# Altium PCB 32pinFFC_Breakout_PCB.PcbDoc
Units mm, origin at the board's own origin, x right, y up, seen from the top; angles counter-clockwise.
Board outline 28.9 x 45.7 mm, 2 copper layers (L1, L2), stack 1.595 mm thick; 10 components, 32 nets, 76 pads, 54 vias.
Unrouted connection lines stored in the file: 30.
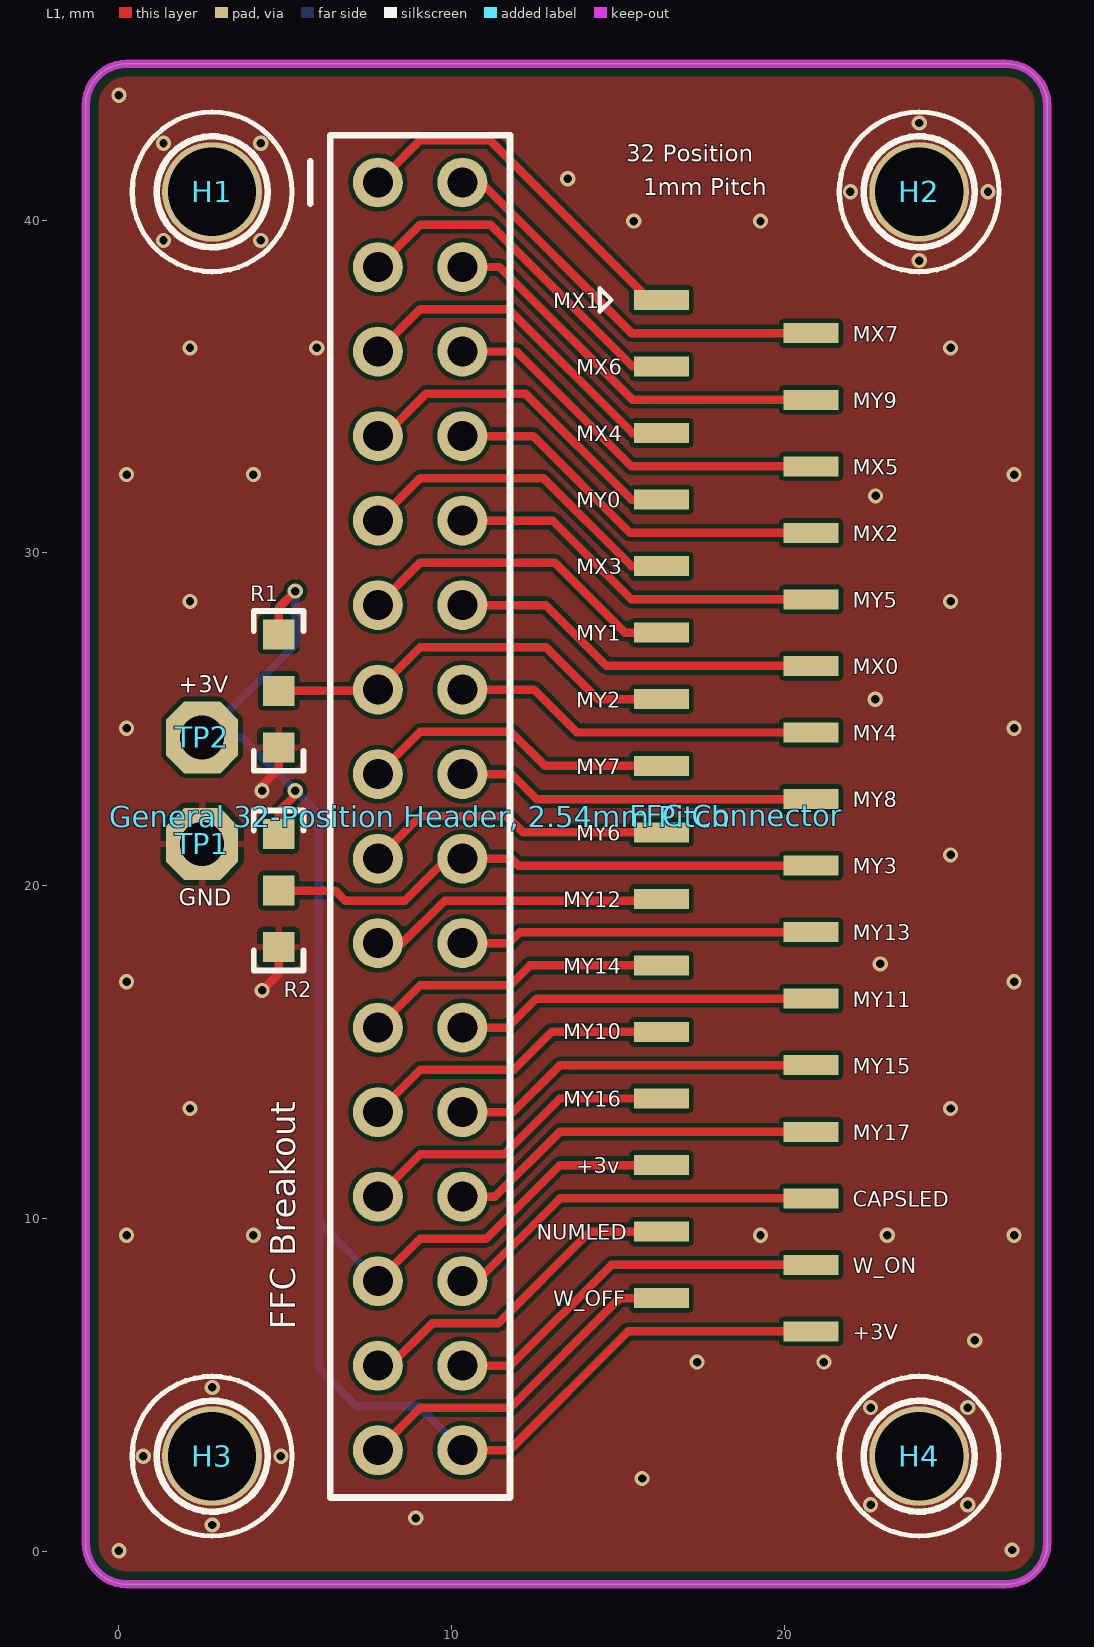
[diagram p0: L1 view]
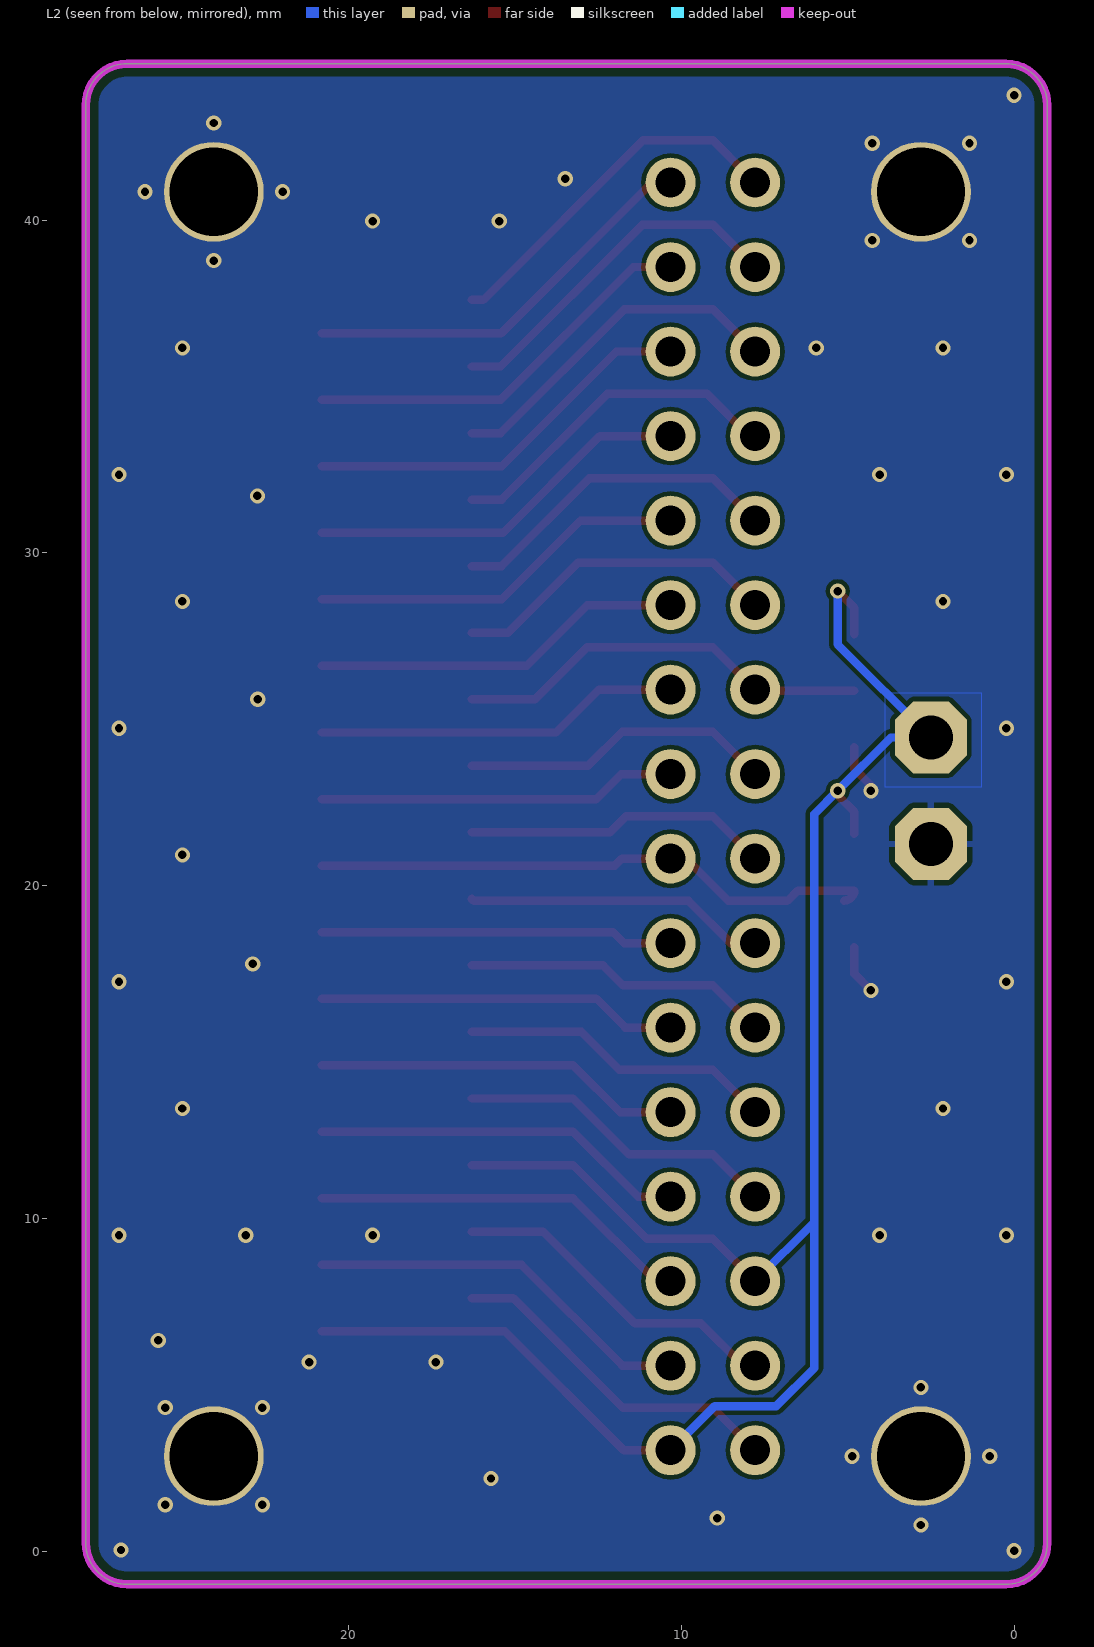
[diagram p1: L2 view, seen from below]

## Layer stack, top to bottom
Top Solder: solder mask 0.0025, Solder Resist, Dk 0
L1: signal copper 0.0356
Core: dielectric 1.524, FR-4, Dk 4.6
L2: signal copper 0.0356
Bottom Solder: solder mask 0.0025, Solder Resist, Dk 0

## Board outline
0.25,-1 cw(c0.25,0.25) -1,0.25 -1,43.45 cw(c0.25,43.45) 0.25,44.7 26.65,44.7 cw(c26.65,43.45) 27.9,43.45 27.9,0.25 cw(c26.65,0.25) 26.65,-1

## Design rules (kind name [scope] priority, off if disabled: settings)
AssemblyTestPointUsage [All] p1 off:
AssemblyTestpoint [(IsPad And (OnTopLayer Or OnBottomLayer)) Or (IsVia) Or (IsPad And OnMultiLayer)] p1 off: testpointundercomponent=FALSE minsize=0.457 maxsize=0.864 preferedsize=0.457 minholesize=0.254 maxholesize=0.66 preferedholesize=0.254 testpointgrid=0.025 usegrid=FALSE gridtolerance=0 allowsidetop=TRUE
BoardOutlineClearance BoardOutlineClearance_Overlays [(OnLayer('Top Overlay') OR OnLayer('Bottom Overlay'))] p1: gap=0.381 ignorepadtopadclearanceinfootprint=FALSE except(0: Arc-OutlineEdge Arc-CavityEdge Arc-CutoutEdge Arc-SplitBarrior Arc-SplitContinuation Track-OutlineEdge Track-CavityEdge Track-CutoutEdge Track-SplitBarrior Track-SplitContinuation Text-OutlineEdge Text-CavityEdge Text-CutoutEdge Text-SplitBarrior Text-SplitContinuation)
BoardOutlineClearance [All] p2: gap=0.381 ignorepadtopadclearanceinfootprint=FALSE
Clearance FiducialClearance [HasFootprint('FIDU_ROUND_20mil') OR HasFootprint('FIDU_ROUND_40mil') OR HasFootprint('FIDU_SQUARE_20mil') OR HasFootprint('FIDU_SQUARE_20mil')] p1: gap=0.66 ignorepadtopadclearanceinfootprint=FALSE
Clearance "TOP_GND Clearance" [InNamedPolygon('Tiva_TopGND')] p2: gap=0.127 ignorepadtopadclearanceinfootprint=FALSE except(0: Arc-Hole Track-Hole SMDPad-Hole THPad-Hole Via-Hole Fill-Hole Poly-Hole Region-Hole Text-Hole)
Clearance "TPS_TopGnd Clearance" [InNamedPolygon('TPS_BottomGnd')] p3: gap=0.127 ignorepadtopadclearanceinfootprint=FALSE except(0: Arc-Hole Track-Hole SMDPad-Hole THPad-Hole Via-Hole Fill-Hole Poly-Hole Region-Hole Text-Hole)
Clearance [All] p4: gap=0.127 ignorepadtopadclearanceinfootprint=FALSE except(0: Arc-Hole Track-Hole SMDPad-Hole THPad-Hole Via-Hole Fill-Hole Poly-Hole Region-Hole Text-Hole)
ComponentClearance [All] p1: gap=0 collisioncheckmode=3 verticalgap=0 showdistances=FALSE
DiffPairsRouting DiffPair_AIN_DIFF1DiffPairsRouting [InDifferentialPairClass('AIN_DIFF1')] p1: maxlimit=0.254 minlimit=0.152 mostfreqgap=0.178 toplayer_minwidth=0.203 toplayer_maxwidth=0.203 toplayer_prefwidth=0.203 bottomlayer_minwidth=0.203 bottomlayer_maxwidth=0.203 bottomlayer_prefwidth=0.203 maxuncoupledlength=2.54
DiffPairsRouting DiffPair_AIN_DIFF2DiffPairsRouting [InDifferentialPairClass('AIN_DIFF2')] p2: maxlimit=0.254 minlimit=0.152 mostfreqgap=0.178 toplayer_minwidth=0.203 toplayer_maxwidth=0.203 toplayer_prefwidth=0.203 bottomlayer_minwidth=0.203 bottomlayer_maxwidth=0.203 bottomlayer_prefwidth=0.203 maxuncoupledlength=2.54
DiffPairsRouting DiffPair_AIN_DIFF3DiffPairsRouting [InDifferentialPairClass('AIN_DIFF3')] p3: maxlimit=0.254 minlimit=0.152 mostfreqgap=0.178 toplayer_minwidth=0.203 toplayer_maxwidth=0.203 toplayer_prefwidth=0.203 bottomlayer_minwidth=0.203 bottomlayer_maxwidth=0.203 bottomlayer_prefwidth=0.203 maxuncoupledlength=2.54
DiffPairsRouting DiffPair_AIN_DIFF4DiffPairsRouting [InDifferentialPairClass('AIN_DIFF4')] p4: maxlimit=0.254 minlimit=0.152 mostfreqgap=0.178 toplayer_minwidth=0.203 toplayer_maxwidth=0.203 toplayer_prefwidth=0.203 bottomlayer_minwidth=0.203 bottomlayer_maxwidth=0.203 bottomlayer_prefwidth=0.203 maxuncoupledlength=2.54
DiffPairsRouting DiffPair_AIN_DIFF8DiffPairsRouting [InDifferentialPairClass('AIN_DIFF8')] p5: maxlimit=0.254 minlimit=0.152 mostfreqgap=0.178 toplayer_minwidth=0.203 toplayer_maxwidth=0.203 toplayer_prefwidth=0.203 bottomlayer_minwidth=0.203 bottomlayer_maxwidth=0.203 bottomlayer_prefwidth=0.203 maxuncoupledlength=2.54
DiffPairsRouting DiffPair_AIN_DIFF9DiffPairsRouting [InDifferentialPairClass('AIN_DIFF9')] p6: maxlimit=0.254 minlimit=0.152 mostfreqgap=0.178 toplayer_minwidth=0.203 toplayer_maxwidth=0.203 toplayer_prefwidth=0.203 bottomlayer_minwidth=0.203 bottomlayer_maxwidth=0.203 bottomlayer_prefwidth=0.203 maxuncoupledlength=2.54
DiffPairsRouting DiffPair_DIFF100DiffPairsRouting [InDifferentialPairClass('DIFF100')] p7: maxlimit=0.711 minlimit=0.178 mostfreqgap=0.254 toplayer_minwidth=0.254 toplayer_maxwidth=0.254 toplayer_prefwidth=0.254 bottomlayer_minwidth=0.254 bottomlayer_maxwidth=0.254 bottomlayer_prefwidth=0.254 maxuncoupledlength=7.163
DiffPairsRouting [All] p8: maxlimit=0.254 minlimit=0.254 mostfreqgap=0.254 toplayer_minwidth=0.381 toplayer_maxwidth=0.381 toplayer_prefwidth=0.381 bottomlayer_minwidth=0.381 bottomlayer_maxwidth=0.381 bottomlayer_prefwidth=0.381 maxuncoupledlength=12.7
FabricationTestPointUsage [All] p1 off: valid=0 allowmultiple=FALSE
FabricationTestpoint [(IsPad And (OnTopLayer Or OnBottomLayer)) Or (IsVia) Or (IsPad And OnMultiLayer)] p1 off: side=1 testpointundercomponent=FALSE minsize=0.457 maxsize=0.864 preferedsize=0.457 minholesize=0 maxholesize=0.66 preferedholesize=0.254 testpointgrid=0.025 allowsidetop=TRUE usegrid=FALSE gridtolerance=0
HoleSize [All] p1: absolutevalues=TRUE maxlimit=3.251 minlimit=0.254 maxpercent=80.000 minpercent=20.000
HoleToHoleClearance [All] p1: gap=0.127 allowstackedmicrovias=TRUE
MatchedLengths DiffPair_AIN_DIFF1MatchedLengths [InDifferentialPairClass('AIN_DIFF1')] p1: tolerance=4.3 checknetsindiffpair=TRUE checkdiffpairvsdiffpair=FALSE checkxsignals=FALSE checkothers=FALSE
MatchedLengths DiffPair_AIN_DIFF2MatchedLengths [InDifferentialPairClass('AIN_DIFF2')] p2: tolerance=4.3 checknetsindiffpair=TRUE checkdiffpairvsdiffpair=FALSE checkxsignals=FALSE checkothers=FALSE
MatchedLengths DiffPair_AIN_DIFF3MatchedLengths [InDifferentialPairClass('AIN_DIFF3')] p3: tolerance=4.3 checknetsindiffpair=TRUE checkdiffpairvsdiffpair=FALSE checkxsignals=FALSE checkothers=FALSE
MatchedLengths DiffPair_AIN_DIFF4MatchedLengths [InDifferentialPairClass('AIN_DIFF4')] p4: tolerance=4.3 checknetsindiffpair=TRUE checkdiffpairvsdiffpair=FALSE checkxsignals=FALSE checkothers=FALSE
MatchedLengths DiffPair_AIN_DIFF8MatchedLengths [InDifferentialPairClass('AIN_DIFF8')] p5: tolerance=4.3 checknetsindiffpair=TRUE checkdiffpairvsdiffpair=FALSE checkxsignals=FALSE checkothers=FALSE
MatchedLengths DiffPair_AIN_DIFF9MatchedLengths [InDifferentialPairClass('AIN_DIFF9')] p6: tolerance=4.3 checknetsindiffpair=TRUE checkdiffpairvsdiffpair=FALSE checkxsignals=FALSE checkothers=FALSE
MatchedLengths DiffPair_DIFF100MatchedLengths [InDifferentialPairClass('DIFF100')] p7: tolerance=1.27 checknetsindiffpair=TRUE checkdiffpairvsdiffpair=FALSE checkxsignals=FALSE checkothers=FALSE
MinimumAnnularRing [All] p1: minimumring=0.102
MinimumSolderMaskSliver MinimumSolderMaskSliverBotSolder [OnLayer('Bottom Solder') vs OnLayer('Bottom Solder')] p1: minsoldermaskwidth=0.01
MinimumSolderMaskSliver [All] p2: minsoldermaskwidth=0.076
NetAntennae [All] p1 off: netantennaetolerance=0
PlaneConnect [All] p1: planeconnectstyle=Relief reliefexpansion=0.508 reliefentries=4 reliefconductorwidth=0.254 reliefairgap=0.203
PolygonConnect ThermalVias [(OnLayer('Ground Plane') OR OnLayer('Power Plane')) vs (IsVia) OR (PadViaLibraryTemplate = 'c150h90')] p1: connectstyle=Direct reliefconductorwidth=0.254 reliefentries=4 polygonreliefangle="90 Angle" airgapwidth=0.254
PolygonConnect DirectVias [IsNamedPolygon('TPS_GND') OR IsNamedPolygon('TPS_JUMP_+3V3') OR IsNamedPolygon('TPS_VSYS') OR IsNamedPolygon('TPS_L1') OR IsNamedPolygon('TPS_L2') OR IsNamedPolygon('TPS_SS') OR IsNamedPolygon('TPS_PG') OR IsNamedPolygon('BQ_VSYS') OR IsNamedPolygon('BQ_PACK+') OR IsNamedPolygon('BQ_USBVBUS') OR IsNamedPolygon('GNDA') OR IsNamedPolygon('Tiva_BottomGND') OR IsNamedPolygon('Tiva_TopGND') OR IsNamedPolygon('FUEL-PGND') vs IsVia] p2: connectstyle=Direct reliefconductorwidth=0.254 reliefentries=4 polygonreliefangle="90 Angle" airgapwidth=0.254
PolygonConnect "Cap Res Relief" [All vs (HasFootprint('C0402_1005') OR HasFootprint('C0603_1608') OR HasFootprint('C1206_3216') OR HasFootprint('C1812_4532') OR HasFootprint('R0402_1005') OR HasFootprint('R0603_1608') OR HasFootprint('R2512_6332') OR HasFootprint('L0402_1005') OR HasFootprint('L0805_2012') OR HasFootprint('L1008_2520') OR HasFootprint('LED0603_Flat') OR HasFootprint('LED0603_Molded'))] p3: connectstyle=Relief reliefconductorwidth=0.203 reliefentries=4 polygonreliefangle="90 Angle" airgapwidth=0.152
PolygonConnect "Pad Template Relief" [All vs (PadViaLibraryTemplate = 'c150h90') OR (PadViaLibraryTemplate = 'c70h30m75')  OR (PadViaLibraryTemplate = 'r102_71') OR (PadViaLibraryTemplate = 'r80_150') OR (PadViaLibraryTemplate = 'r145_200') OR (PadViaLibraryTemplate = 'r145_90') OR (PadViaLibraryTemplate = 'r140_120') OR (PadViaLibraryTemplate = 'r95_90') OR (PadViaLibraryTemplate = 's216h132c50')  OR (PadViaLibraryTemplate = 'c216h132')] p4: connectstyle=Relief reliefconductorwidth=0.203 reliefentries=4 polygonreliefangle="90 Angle" airgapwidth=0.152
PolygonConnect "General Direct Connect" [IsNamedPolygon('TPS_L1') OR IsNamedPolygon('TPS_L2') OR IsNamedPolygon('TPS_SS') OR IsNamedPolygon('TPS_PG') OR IsNamedPolygon('BQ_VSYS') OR IsNamedPolygon('BQ_PACK+') OR IsNamedPolygon('BQ_USBVBUS') OR IsNamedPolygon('FUEL-Bat') OR IsNamedPolygon('Pack+') OR IsNamedPolygon('GNDA')] p5 off: connectstyle=Direct reliefconductorwidth=0.254 reliefentries=4 polygonreliefangle="90 Angle" airgapwidth=0.254
PolygonConnect "General Direct Connect ALL" [All] p6: connectstyle=Direct reliefconductorwidth=0.254 reliefentries=4 polygonreliefangle="90 Angle" airgapwidth=0.254
PolygonConnect [All] p7: connectstyle=Relief reliefconductorwidth=0.203 reliefentries=4 polygonreliefangle="90 Angle" airgapwidth=0.152
RoutingCorners [All] p1: cornerstyle=45-Degree minsetback=0.127 maxsetback=2.54
RoutingVias [All] p1: holewidth=0.254 width=0.457 viastyle="Through Hole" minholewidth=0.254 minwidth=0.457 maxholewidth=1.067 maxwidth=1.27
ShortCircuit ThermalViasShrtCkt [IsVia] p1: allowed=TRUE
ShortCircuit [All] p2: allowed=FALSE
SilkToSilkClearance [All] p1 off: silktosilkclearance=0.025
SilkToSolderMaskClearance [IsPad] p1: minsilkscreentomaskgap=0.025 clearancetoexposedcopper=TRUE
SolderMaskExpansion [All] p1: expansion=0.05
Width "50 Ohm" [InNetClass('50 OHM')] p1: maxlimit=0.508 minlimit=0.203 preferedwidth=0.254 impedancedriven=TRUE minimp=49.000000 maximp=51.000000 favimp=50.000000
Width [All] p2: maxlimit=2.508 minlimit=0.102 preferedwidth=0.203 minimp=50.000000 maximp=50.000000 favimp=50.000000
15 further rules are at their usual default settings.

## Components (designator, comment, footprint, x,y, rotation, side; value= is the part's Value field where it differs from the comment)
"FFC Connector" "hanetzer FFC Connector" "Hanetzer 32Pin FCC Connector" 18.55,22.1 r270 top
"General 32-Position Header, 2.54mm Pitch" "hanetzer header" "hanetzer header" 9.05,23.35 r0 top
H1 "Mounting Hole" MntHole-M2.5x4mm 2.8,40.85 r0 top
H2 "Mounting Hole" MntHole-M2.5x4mm 24.05,40.85 r0 top
H3 "Mounting Hole" MntHole-M2.5x4mm 2.8,2.85 r0 top
H4 "Mounting Hole" MntHole-M2.5x4mm 24.05,2.85 r0 top
R1 "0" R0603_1608_Three_Pad 4.8,27.55 r270 top
R2 "0" R0603_1608_Three_Pad 4.8,21.55 r270 top
TP1 "TestPt" TP1 2.5,21.25 r0 top
TP2 "TestPt" TP1_ROUND 2.5,24.45 r0 top

## Footprints (in the part's own frame and the unit in brackets; to place one, negate y for a bottom-side part, rotate by r counter-clockwise, add the part's x,y. Pads: shape width x height; smd on the part's side, far side on the other; paste and mask are expansions set on the pad)
"Hanetzer 32Pin FCC Connector" [mm]
  rect 0.6x1.65 smd: 1(-15.5,-2.25) 2(-14.5,2.25) 3(-13.5,-2.25) 4(-12.5,2.25) 5(-11.5,-2.25) 6(-10.5,2.25) 7(-9.5,-2.25) 8(-8.5,2.25) 9(-7.5,-2.25) 10(-6.5,2.25) 11(-5.5,-2.25) 12(-4.5,2.25) 13(-3.5,-2.25) 14(-2.5,2.25) 15(-1.5,-2.25) 16(-0.5,2.25) 17(0.5,-2.25) 18(1.5,2.25) 19(2.5,-2.25) 20(3.5,2.25) 21(4.5,-2.25) 22(5.5,2.25) 23(6.5,-2.25) 24(7.5,2.25) 25(8.5,-2.25) 26(9.5,2.25) 27(10.5,-2.25) 28(11.5,2.25) 29(12.5,-2.25) 30(13.5,2.25) 31(14.5,-2.25) 32(15.5,2.25)
  silkscreen extent -15.85,-4.1 -15.15,-3.75, body extent -17.5,-2.25 17.5,2.25, height 5.25
"hanetzer header" [mm]
  round 1.5 hole 0.9: 1(-1.27,17.78) 2(1.27,17.78) 3(-1.27,15.24) 4(1.27,15.24) 5(-1.27,12.7) 6(1.27,12.7) 7(-1.27,10.16) 8(1.27,10.16) 9(-1.27,7.62) 10(1.27,7.62) 11(-1.27,5.08) 12(1.27,5.08) 13(-1.27,2.54) 14(1.27,2.54) 15(-1.27,0) 16(1.27,0) 17(-1.27,-2.54) 18(1.27,-2.54) 19(-1.27,-5.08) 20(1.27,-5.08) 21(-1.27,-7.62) 22(1.27,-7.62) 23(-1.27,-10.16) 24(1.27,-10.16) 25(-1.27,-12.7) 26(1.27,-12.7) 27(-1.27,-15.24) 28(1.27,-15.24) 29(-1.27,-17.78) 30(1.27,-17.78) 31(-1.27,-20.32) 32(1.27,-20.32)
  silkscreen extent -3.3,-21.74 2.7,19.2
MntHole-M2.5x4mm [mm] "Mounting Hole, 2.5X4mm Machine Screws"
  round 3 hole 2.65 paste+0 mask+0.1: 1(0,0)
  silkscreen extent -2.4,-2.4 2.4,2.4, body extent -2.25,-2.25 2.25,2.25, height 2.24
R0603_1608_Three_Pad [mm] "Chip Resistor, 2-Leads, Body 1.60x0.80mm, IPC Medium Density"
  rect 0.9x0.95 smd: 1(0,0) 2(1.7,0) 3(3.4,0)
  silkscreen extent -0.7,-0.75 4.1,0.75, body extent 0,-0.45 1.7,0.45, height 0.55
TP1 [mil]
  oct 85x85 hole 52: TP(0,0)
TP1_ROUND [mil]
  oct 85x85 hole 52: TP(0,0)

## Part data
"FFC Connector": Current Rating="1 A", Insulation Resistance="500 MOhms", Manufacturer="Amphenol FCI", Manufacturer Part Number=HFW32S-2STE1LF, Maximum Operating Temperature="+ 85 C", Minimum Operating Temperature="- 55 C", Supplier Part Number 1=649-HFW32S-2STE1LF, Voltage Rating="100 VAC/DC", Actuation Type="Non ZIF", Brand="Amphenol FCI", Category="FFC & FPC Connectors", ComponentLink1Description=https://www.mouser.com/ds/2/18/sc-hfws06-943200.pdf, ComponentLink1URL=https://www.mouser.com/ds/2/18/sc-hfws06-943200.pdf, Contact Location="Bottom Contact", Contact Material="Phosphor Bronze", Contact Plating=Tin, Housing Material="Polyamide (PA)", Minimum Order Quantity=1, Mounting Angle=Straight, Number of Positions="32 Position", Packaging="Cut Tape", Pitch="1 mm", Pricing 1="1=0.530, 10=0.393, 100=0.377, 500=0.327, 1000=0.270, 2000=0.246, 5000=0.238, 10000=0.221, 25000=0.218 (USD)", Product="Board Mount", Reeling=True, RoHS="RoHS Compliant", RoHS - Mouser=Y, Series=HFW-S, Standard Pack Qty=1000, Stock 1=1236, Supplier 1=Mouser, Termination Style=SMD
H1 H2 H3 H4: library part MntHole_M2.5x4mm, "Mount Hole for M2.5x4mm Machine Screws"
R1 R2: library part R0THREEPAD(0603/1608)_1, "0 Resistor", Case Code - in=0603, Case Code - mm=1608, Manufacturer=Yageo, Manufacturer Part Number=RC0603FR-070RL, Operating Temperature Range="- 55 C to + 155 C", Package / Case="0603 (1608 metric)", Power Rating=-, Resistance="0 Ohms", Supplier Part Number 1=603-RC0603FR-070RL, Brand=Yageo, Category="Thick Film Resistors - SMD", ComponentLink1Description=http://www.mouser.com/ds/2/447/RC0603-272842.pdf, ComponentLink1URL=http://www.mouser.com/ds/2/447/RC0603-272842.pdf, Height="0.45 mm", Length="1.6 mm", Minimum Order Quantity=1, Packaging=Reel, Pricing 1="1=0.100, 10=0.010, 100=0.003, 1000=0.002, 5000=0.002, 10000=0.001 (USD)", Product="Thick Film Resistors Zero-Ohm", Reeling=True, RoHS="RoHS Compliant By Exemption", RoHS - Mouser=E, Series=RC, Standard Pack Qty=5000, Stock 1=686909, Supplier 1=Mouser, Temperature Coefficient=-, Termination Style=SMD/SMT, Tolerance=-, Type="General Purpose Chip Resistor Surface Mount", Voltage Rating=-, Width="0.8 mm"
TP1: library part TPPAD, "Test Point"
TP2: library part TPPAD_ROUND, "Test Point"

## Via types
v1: diameter 0.457, hole 0.254, L1 to L2, tented both sides, 50 vias
v2: diameter 0.457, hole 0.254, L1 to L2, 4 vias

## Nets (pads, with @x,y where several pads share a name; then routed paths per layer and width w, separated by ;. In a path a pad name is that pad's centre, name@x,y a point inside that pad or via, vN(x,y) a via of type N, cw(c..) or ccw(c..) an arc to the next point about the centre after c; other vN are vias at no path point)
3V: "FFC Connector.27" "FFC Connector.32" "General 32-Position Header, 2.54mm Pitch.27" "General 32-Position Header, 2.54mm Pitch.32" R1.1 R2.1 TP2.TP | length 59.5
  L1 w0.254: R2.1 4.8,22.218 5.3,22.718 v2(5.3,22.85) ; R1.1 4.8,28.35 v2(5.3,28.85) ; 7.78,8.11 9.05,9.38 11.03,9.38 13.25,11.6 16.3,11.6 ; 10.32,3.03 11.73,3.03 15.3,6.6 20.8,6.6
  L2 w0.254: v2(5.3,28.85) 5.3,27.25 TP2.TP 3.7,24.45 v2(5.3,22.85) 6,22.15 6,9.89 ; 7.78,8.11 6,9.89 ; 10.32,3.03 9,4.35 7.15,4.35 6,5.5 6,9.89
CAPSLED: "FFC Connector.28" "General 32-Position Header, 2.54mm Pitch.28" | length 11.5
  L1 w0.254: 10.32,8.11 10.76,8.11 13.25,10.6 20.8,10.6
GND: H1.1 H2.1 H3.1 H4.1 R1.3 R2.3 TP1.TP | length 3
  L1 w0.254: v2(4.3,16.85) 4.8,17.35 R2.3 ; v2(4.3,22.85) 4.3,23.01 4.8,23.51 R1.3
  other v1: -0.001,0.01 26.84,0.03 2.8,0.782 8.92,0.99 22.588,1.388 25.512,1.388 15.72,2.18 0.732,2.85 4.868,2.85 22.588,4.312 25.512,4.312 2.8,4.918 17.375,5.68 21.185,5.68 25.72,6.33 0.23,9.49 4.04,9.49 19.28,9.49 23.09,9.49 26.9,9.49 2.135,13.3 24.995,13.3 0.23,17.11 26.9,17.11 22.88,17.645 24.995,20.92 0.23,24.73 26.9,24.73 22.73,25.6 2.135,28.54 24.995,28.54 22.74,31.71 0.23,32.35 4.04,32.35 26.9,32.35 2.135,36.16 5.945,36.16 24.995,36.16 24.05,38.782 1.338,39.388 4.262,39.388 15.47,39.97 19.28,39.97 21.982,40.85 26.118,40.85 13.49,41.24 1.338,42.312 4.262,42.312 24.05,42.918 -0.001,43.75
MX0: "FFC Connector.12" "General 32-Position Header, 2.54mm Pitch.12" | length 11.2
  L1 w0.254: 10.32,28.43 12.82,28.43 14.65,26.6 20.8,26.6
MX1: "FFC Connector.1" "General 32-Position Header, 2.54mm Pitch.1" | length 11.2
  L1 w0.254: 7.78,41.13 8.08,41.13 8.08,41.43 9.05,42.4 11.15,42.4 15.95,37.6 16.3,37.6
MX2: "FFC Connector.8" "General 32-Position Header, 2.54mm Pitch.8" | length 11.7
  L1 w0.254: 10.32,33.51 12.45,33.51 15.36,30.6 20.8,30.6
MX3: "FFC Connector.9" "General 32-Position Header, 2.54mm Pitch.9" | length 10.1
  L1 w0.254: 7.78,30.97 9.05,32.24 12.76,32.24 15.4,29.6 16.3,29.6
MX4: "FFC Connector.5" "General 32-Position Header, 2.54mm Pitch.5" | length 10.6
  L1 w0.254: 7.78,36.05 9.05,37.32 11.71,37.32 15.43,33.6 16.3,33.6
MX5: "FFC Connector.6" "General 32-Position Header, 2.54mm Pitch.6" | length 11.9
  L1 w0.254: 10.32,36.05 11.95,36.05 15.4,32.6 20.8,32.6
MX6: "FFC Connector.3" "General 32-Position Header, 2.54mm Pitch.3" | length 10.8
  L1 w0.254: 7.78,38.59 9.05,39.86 11.17,39.86 15.43,35.6 16.3,35.6
MX7: "FFC Connector.2" "General 32-Position Header, 2.54mm Pitch.2" | length 11.8
  L1 w0.254: 10.83,41.13 10.88,41.13 15.41,36.6 20.8,36.6
MY0: "FFC Connector.7" "General 32-Position Header, 2.54mm Pitch.7" | length 10.4
  L1 w0.254: 7.78,33.51 7.96,33.51 9.23,34.78 12.22,34.78 15.4,31.6 16.3,31.6
MY1: "FFC Connector.11" "General 32-Position Header, 2.54mm Pitch.11" | length 9.9
  L1 w0.254: 7.78,28.43 9.05,29.7 13.1,29.7 15.2,27.6 16.3,27.6
MY2: "FFC Connector.13" "General 32-Position Header, 2.54mm Pitch.13" R1.2 | length 12.7
  L1 w0.254: R1.2 7.74,25.85 7.78,25.89 9.05,27.16 12.84,27.16 14.4,25.6 16.3,25.6
MY3: "FFC Connector.18" "General 32-Position Header, 2.54mm Pitch.18" R2.2 | length 17.2
  L1 w0.254: R2.2@5.1,19.55 cw(c5.1,19.85) R2.2 6.5,19.85 6.81,19.54 8.584,19.54 9.854,20.81 10.32,20.81 11.79,20.81 12,20.6 20.8,20.6
MY4: "FFC Connector.14" "General 32-Position Header, 2.54mm Pitch.14" | length 11
  L1 w0.254: 10.32,25.89 12.471,25.89 13.761,24.6 20.8,24.6
MY5: "FFC Connector.10" "General 32-Position Header, 2.54mm Pitch.10" | length 11.5
  L1 w0.254: 10.32,30.97 13.03,30.97 15.4,28.6 20.8,28.6
MY6: "FFC Connector.17" "General 32-Position Header, 2.54mm Pitch.17" | length 9.2
  L1 w0.254: 7.78,20.81 9.05,22.08 11.67,22.08 12.15,21.6 16.3,21.6
MY7: "FFC Connector.15" "General 32-Position Header, 2.54mm Pitch.15" | length 9.5
  L1 w0.254: 7.78,23.35 9.05,24.62 11.78,24.62 12.8,23.6 16.3,23.6
MY8: "FFC Connector.16" "General 32-Position Header, 2.54mm Pitch.16" | length 10.8
  L1 w0.254: 10.32,23.35 11.8,23.35 12.55,22.6 20.8,22.6
MY9: "FFC Connector.4" "General 32-Position Header, 2.54mm Pitch.4" | length 12.1
  L1 w0.254: 10.32,38.59 11.44,38.59 15.43,34.6 20.8,34.6
MY10: "FFC Connector.23" "General 32-Position Header, 2.54mm Pitch.23" | length 9.5
  L1 w0.254: 7.78,13.19 9.05,14.46 11.86,14.46 13,15.6 16.3,15.6
MY11: "FFC Connector.22" "General 32-Position Header, 2.54mm Pitch.22" | length 10.8
  L1 w0.254: 10.32,15.73 11.68,15.73 12.55,16.6 20.8,16.6
MY12: "FFC Connector.19" "General 32-Position Header, 2.54mm Pitch.19" | length 9.1
  L1 w0.254: 7.78,18.27 8.512,18.27 9.782,19.54 16.24,19.54 16.3,19.6
MY13: "FFC Connector.20" "General 32-Position Header, 2.54mm Pitch.20" | length 10.6
  L1 w0.254: 10.32,18.27 11.72,18.27 12.05,18.6 20.8,18.6
MY14: "FFC Connector.21" "General 32-Position Header, 2.54mm Pitch.21" | length 9.3
  L1 w0.254: 7.78,15.73 9.05,17 11.75,17 12.35,17.6 16.3,17.6
MY15: "FFC Connector.24" "General 32-Position Header, 2.54mm Pitch.24" | length 11.1
  L1 w0.254: 10.32,13.19 11.84,13.19 13.25,14.6 20.8,14.6
MY16: "FFC Connector.25" "General 32-Position Header, 2.54mm Pitch.25" | length 9.7
  L1 w0.254: 7.78,10.65 9.05,11.92 11.57,11.92 13.25,13.6 16.3,13.6
MY17: "FFC Connector.26" "General 32-Position Header, 2.54mm Pitch.26" | length 11.3
  L1 w0.254: 10.32,10.65 11.3,10.65 13.25,12.6 20.8,12.6
NUMLED: "FFC Connector.29" "General 32-Position Header, 2.54mm Pitch.29" | length 10.2
  L1 w0.254: 7.78,5.57 8.146,5.57 9.416,6.84 11.398,6.84 14.158,9.6 16.3,9.6
WIRELESS_OFF: "FFC Connector.31" "General 32-Position Header, 2.54mm Pitch.31" | length 10.4
  L1 w0.254: 7.78,3.03 9.05,4.3 11.75,4.3 15.05,7.6 16.3,7.6
WIRELESS_ON: "FFC Connector.30" "General 32-Position Header, 2.54mm Pitch.30" | length 11.7
  L1 w0.254: 10.32,5.57 11.77,5.57 14.8,8.6 20.8,8.6

## Polygon pours and split planes (outlines as drawn)
3V on L2 "Bottom +3V" (solid, remove dead copper, pour order 4): 3.864,25.8 0.99,25.8 0.99,22.95 3.864,22.95
GND on L2 "Bottom GND" (solid, remove dead copper, pour order 0): -1.25,44.95 28.15,44.95 28.15,-1.25 -1.25,-1.25
GND on L1 "Top GND" (solid, remove dead copper, pour order 2): -1.25,-1.25 -1.25,44.95 28.15,44.95 28.15,-1.25

## Keep-outs
Keep-Out Layer:
  the board outline again, w0.254

## Silkscreen, mask and mechanical layers (free items; w line width, h text height)
Top Overlay:
  text "32 Position" at 15.25,41.75 h0.5
  text "1mm Pitch" at 15.75,40.75 h0.5
  text "MX1" at 13.05,37.35 h0.46
  text "MX7" at 22.05,36.35 h0.46
  text "MX6" at 13.75,35.35 h0.46
  text "MY9" at 22.05,34.35 h0.46
  text "MX4" at 13.75,33.35 h0.46
  text "MX5" at 22.05,32.35 h0.46
  text "MY0" at 13.75,31.35 h0.46
  text "MX2" at 22.05,30.35 h0.46
  text "MX3" at 13.75,29.35 h0.46
  text "MY5" at 22.05,28.35 h0.46
  text "MY1" at 13.75,27.35 h0.46
  text "MX0" at 22.05,26.35 h0.46
  text "+3V" at 1.8,25.8 h0.5
  text "MY2" at 13.75,25.35 h0.46
  text "MY4" at 22.05,24.35 h0.46
  text "MY7" at 13.75,23.35 h0.46
  text "MY8" at 22.05,22.35 h0.46
  text "MY6" at 13.75,21.35 h0.46
  text "MY3" at 22.05,20.35 h0.46
  text "GND" at 1.8,19.4 h0.5
  text "MY12" at 13.35,19.35 h0.46
  text "MY13" at 22.05,18.35 h0.46
  text "MY14" at 13.35,17.35 h0.46
  text "MY11" at 22.05,16.35 h0.46
  text "MY10" at 13.35,15.375 h0.46
  text "MY15" at 22.05,14.35 h0.46
  text "MY16" at 13.35,13.35 h0.46
  text "MY17" at 22.05,12.35 h0.46
  text "+3v" at 13.75,11.35 h0.46
  text "CAPSLED" at 22.05,10.35 h0.46
  text "NUMLED" at 12.55,9.35 h0.46
  text "W_ON" at 22.05,8.35 h0.46
  text "W_OFF" at 13.05,7.35 h0.46
  text "FFC Breakout" at 5.3,6.65 h0.75 r90
  text "+3V" at 22.05,6.35 h0.46
Top Solder:
  lines w1.946: -0.75,0 -0.75,43.7 ; -0.75,0.5 ccw(c0.5,0.5) 0.5,-0.75 ; -0.75,43.2 cw(c0.5,43.2) 0.5,44.45 ; 0,-0.75 26.9,-0.75 ; 0,44.45 26.9,44.45 ; 26.4,-0.75 ccw(c26.4,0.5) 27.65,0.5 ; 26.4,44.45 cw(c26.4,43.2) 27.65,43.2 ; 27.65,0 27.65,43.7
  text "FOSS" at 12.75,1.05 h2.22
Bottom Solder:
  lines w0.254: 4.3,16.85 4.8,17.35 4.8,18.15 ; 4.3,22.85 4.3,23.01 4.8,23.51 4.8,24.15 ; 4.8,19.85 6.5,19.85 6.81,19.54 8.584,19.54 9.854,20.81 10.32,20.81 11.79,20.81 12,20.6 20.8,20.6 ; 4.8,21.55 4.8,22.218 5.3,22.718 5.3,22.85 ; 4.8,25.85 7.74,25.85 7.78,25.89 9.05,27.16 12.84,27.16 14.4,25.6 16.3,25.6 ; 4.8,27.55 4.8,28.35 5.3,28.85 ; 7.78,3.03 9.05,4.3 11.75,4.3 15.05,7.6 16.3,7.6 ; 7.78,5.57 8.146,5.57 9.416,6.84 11.398,6.84 14.158,9.6 16.3,9.6 ; 7.78,8.11 9.05,9.38 11.03,9.38 13.25,11.6 16.3,11.6 ; 7.78,10.65 9.05,11.92 11.57,11.92 13.25,13.6 16.3,13.6 ; 7.78,13.19 9.05,14.46 11.86,14.46 13,15.6 16.3,15.6 ; 7.78,15.73 9.05,17 11.75,17 12.35,17.6 16.3,17.6 ; 7.78,18.27 8.512,18.27 9.782,19.54 16.24,19.54 16.3,19.6 ; 7.78,20.81 9.05,22.08 11.67,22.08 12.15,21.6 16.3,21.6 ; 7.78,23.35 9.05,24.62 11.78,24.62 12.8,23.6 16.3,23.6 ; 7.78,28.43 9.05,29.7 13.1,29.7 15.2,27.6 16.3,27.6 ; 7.78,30.97 9.05,32.24 12.76,32.24 15.4,29.6 16.3,29.6 ; 7.78,33.51 7.96,33.51 9.23,34.78 12.22,34.78 15.4,31.6 16.3,31.6 ; 7.78,36.05 9.05,37.32 11.71,37.32 15.43,33.6 16.3,33.6 ; 7.78,38.59 9.05,39.86 11.17,39.86 15.43,35.6 16.3,35.6 ; 8.08,41.13 8.08,41.43 9.05,42.4 11.15,42.4 15.95,37.6 16.3,37.6 ; 10.32,3.03 11.73,3.03 15.3,6.6 20.8,6.6 ; 10.32,5.57 11.77,5.57 14.8,8.6 20.8,8.6 ; 10.32,8.11 10.76,8.11 13.25,10.6 20.8,10.6 ; 10.32,10.65 11.3,10.65 13.25,12.6 20.8,12.6 ; 10.32,13.19 11.84,13.19 13.25,14.6 20.8,14.6 ; 10.32,15.73 11.68,15.73 12.55,16.6 20.8,16.6 ; 10.32,18.27 11.72,18.27 12.05,18.6 20.8,18.6 ; 10.32,23.35 11.8,23.35 12.55,22.6 20.8,22.6 ; 10.32,25.89 12.471,25.89 13.761,24.6 20.8,24.6 ; 10.32,28.43 12.82,28.43 14.65,26.6 20.8,26.6 ; 10.32,30.97 13.03,30.97 15.4,28.6 20.8,28.6 ; 10.32,33.51 12.45,33.51 15.36,30.6 20.8,30.6 ; 10.32,36.05 11.95,36.05 15.4,32.6 20.8,32.6 ; 10.32,38.59 11.44,38.59 15.43,34.6 20.8,34.6 ; 10.83,41.13 10.88,41.13 15.41,36.6 20.8,36.6
  lines w1.946: -0.75,0 -0.75,43.7 ; -0.75,0.5 ccw(c0.5,0.5) 0.5,-0.75 ; -0.75,43.2 cw(c0.5,43.2) 0.5,44.45 ; 0,-0.75 26.9,-0.75 ; 0,44.45 26.9,44.45 ; 26.4,-0.75 ccw(c26.4,0.5) 27.65,0.5 ; 26.4,44.45 cw(c26.4,43.2) 27.65,43.2 ; 27.65,0 27.65,43.7